# EAGLE board board1 (EAGLE 9.6.2)
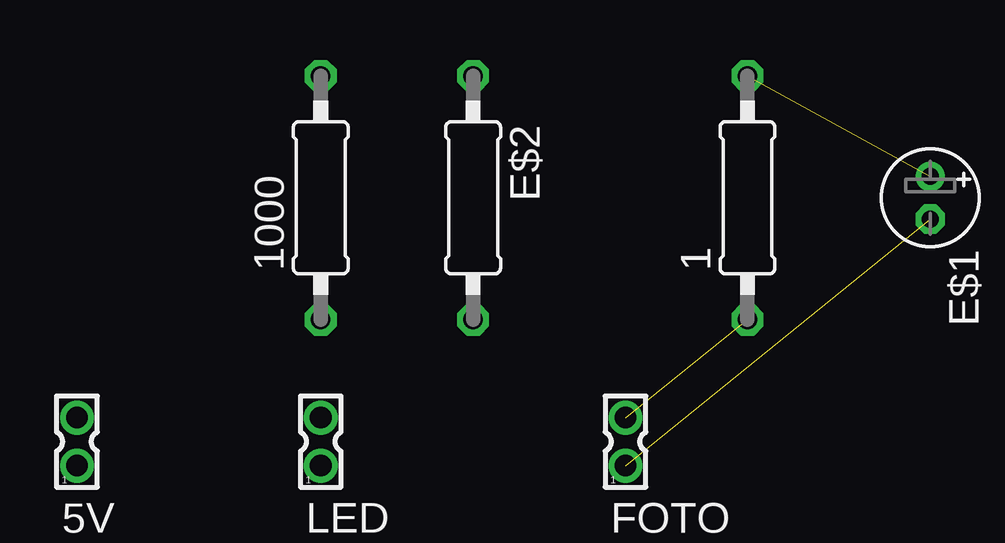
[diagram p0: board, top side]
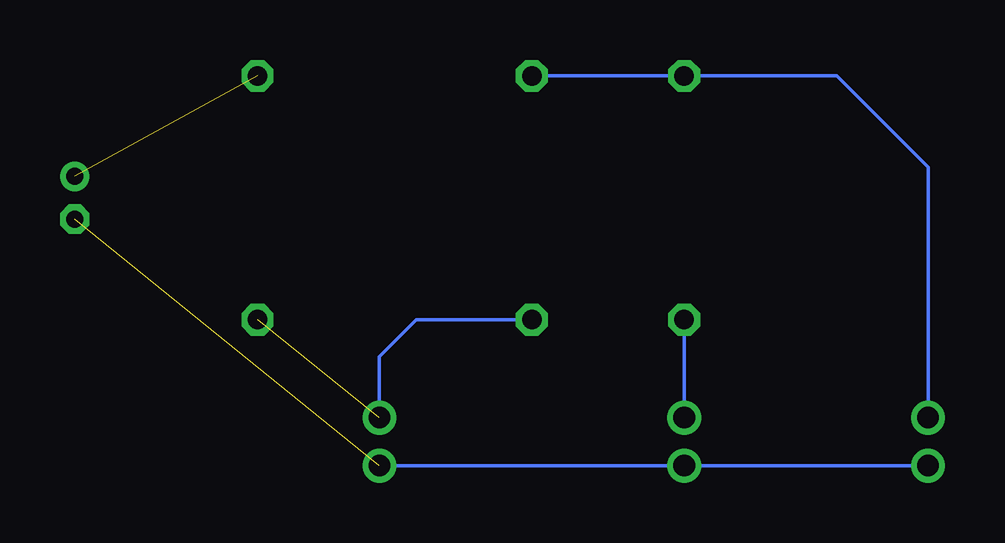
[diagram p1: board, bottom side, seen from below]

No outline drawn. Coordinates in mm, seen from the top.
Copper layers (1*16): Top 0.035mm / dielectric 1.5mm / Bottom 0.035mm
Design rules "default": minimum track width 6mil, minimum drill 0.35mm, track to track 6mil, track to pad 6mil, pad to pad 6mil, via to via 6mil, smd to smd 6mil, copper to edge 40mil, drill to drill 6mil, minimum pad ring 10mil, minimum via ring 8mil, stop-mask expansion 4mil, vias tented up to drill 0mil, thermal gap 10mil

## Footprints (pad centres in the part's own frame; a part is rotated, then mirrored left to right if it is on the bottom)
0207/10 = drill 0.813 octagon: 1 -5.08,0; 2 5.08,0
332-02 = drill 0.9 pad 1.27: 1 0,-1; 2 0,1
E1,8-4 = drill 0.711 pad 1.168: + -0.889,0 | drill 0.711 pad 1.168 octagon: - 0.889,0

## Placement (x,y rotation side)
1  [0207/10]  58.42,43.18 90 top
5V  [332-02]  30.48,33.02 0 top
1000  [0207/10]  40.64,43.18 90 top
E$1  [E1,8-4]  66.04,43.18 270 top
E$2  [0207/10]  46.99,43.18 270 top
FOTO  [332-02]  53.34,33.02 0 top
LED  [332-02]  40.64,33.02 0 top

## Library data of the parts
1 1000 E$1 E$2 = rcl
5V FOTO LED = con-garry

## Nets
S$1: 5V.2 1000.2 E$2.1
S$2: 1.2 E$1.+
S$3: 1000.1 LED.2
S$4: 5V.1 E$1.- FOTO.1 LED.1
S$5: 1.1 E$2.2 FOTO.2

## Tracks (layer width: path | path; a pad name or v marks a point on that pad's centre or on a via)
S$1
  Bottom 0.152: 5V.2 30.48,44.45 34.29,48.26 1000.2 E$2.1
S$2  (1 unrouted)
S$3
  Bottom 0.152: LED.2 1000.1
S$4  (1 unrouted)
  Bottom 0.152: 5V.1 LED.1 FOTO.1
S$5  (1 unrouted)
  Bottom 0.152: FOTO.2 53.34,36.56 51.8,38.1 E$2.2